# Altium PCB Ethernet Shield v2.0.PcbDoc
Units mil, origin at the board's own origin, x right, y up, seen from the top; angles counter-clockwise.
Board outline 2700 x 2100 mil, 2 copper layers (Top, Bottom); 75 components, 63 nets, 297 pads, 127 vias.
Unrouted connection lines stored in the file: 2.
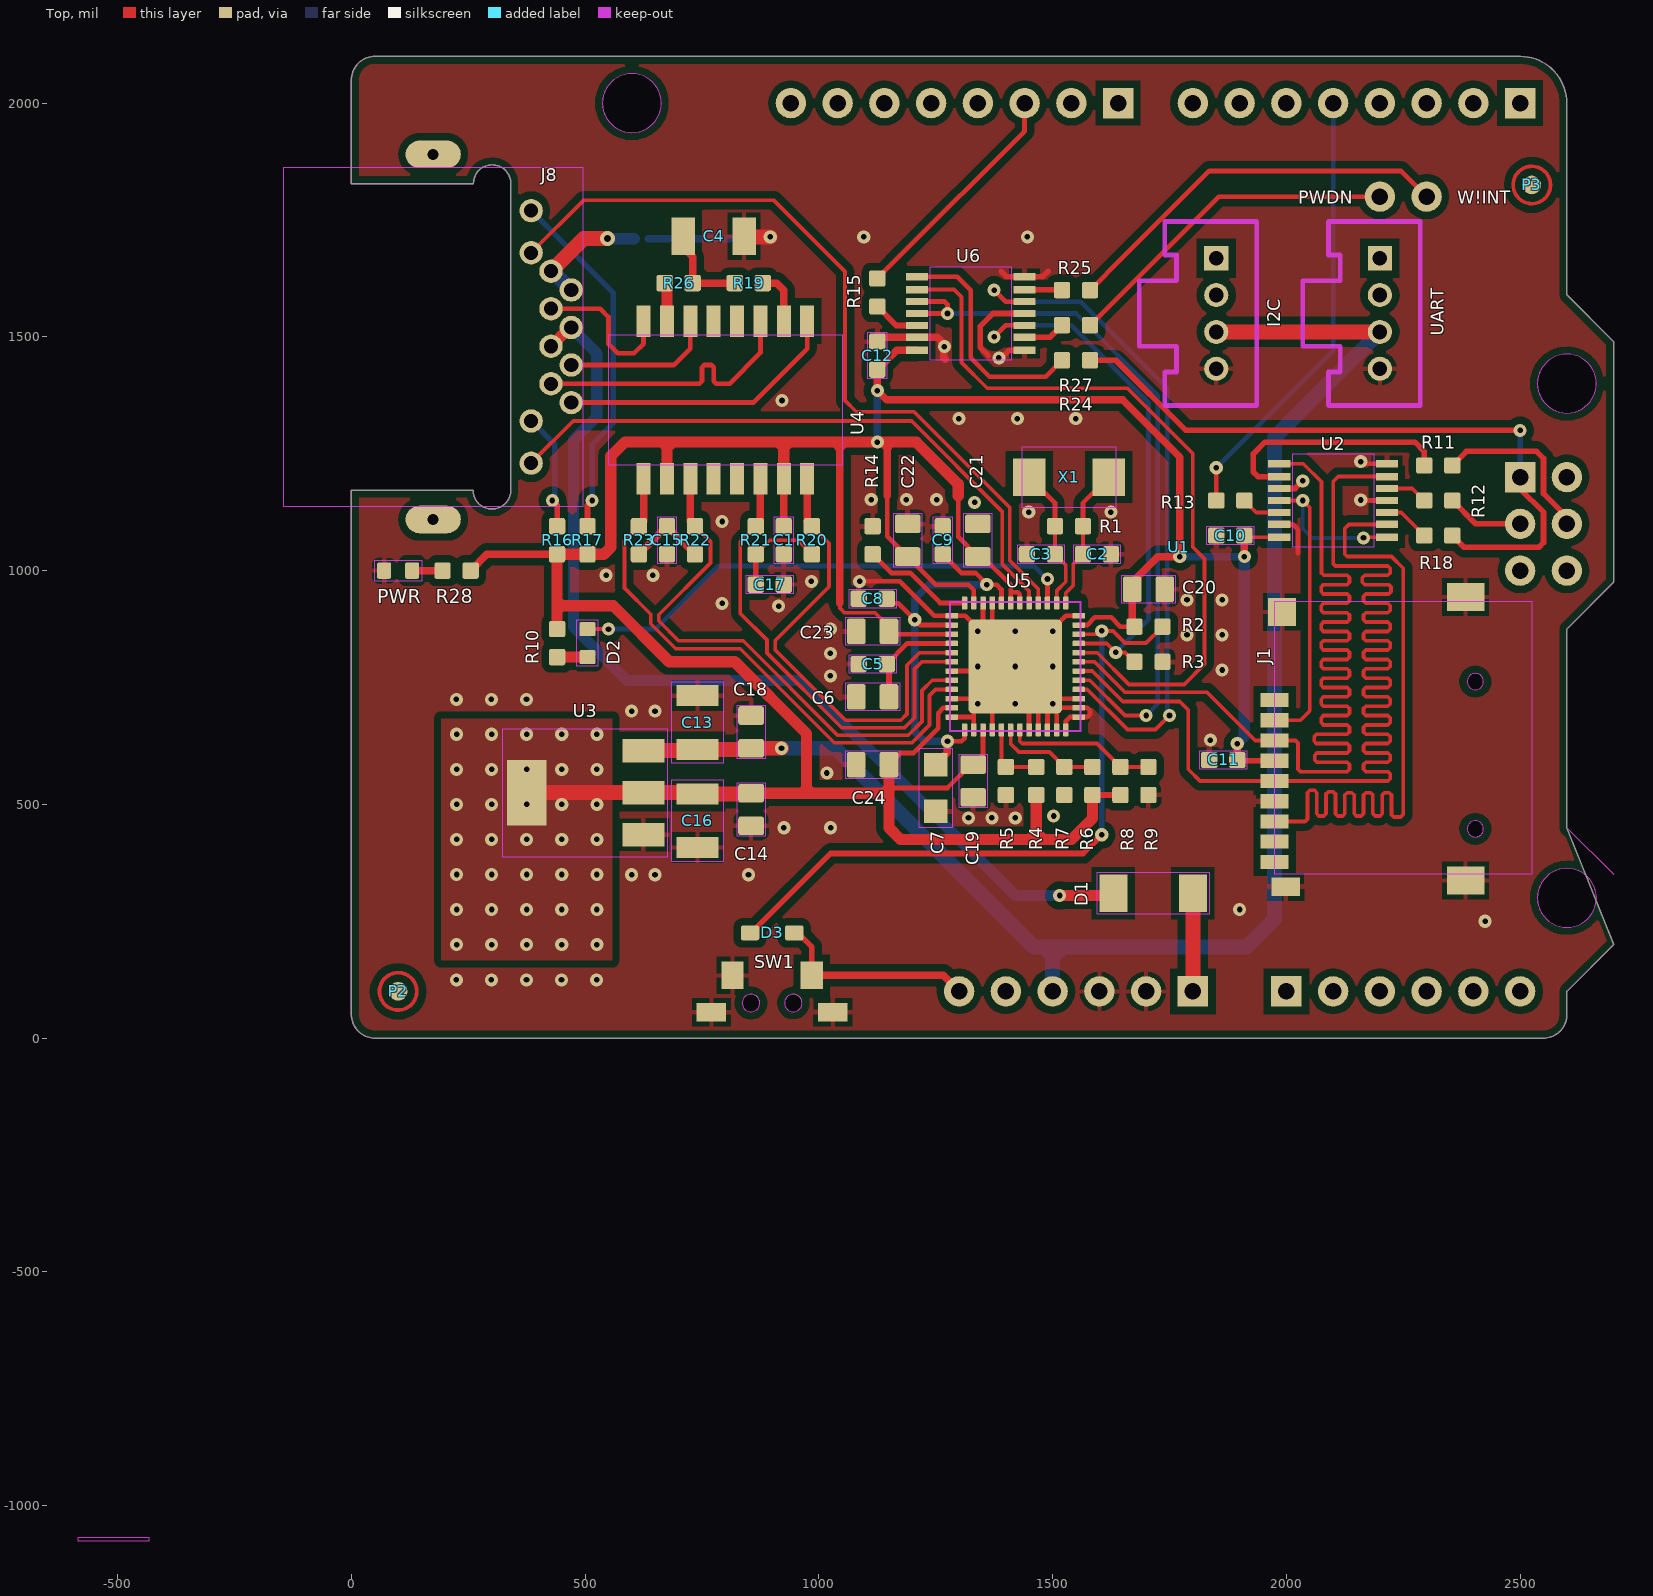
[diagram p0: Top view]
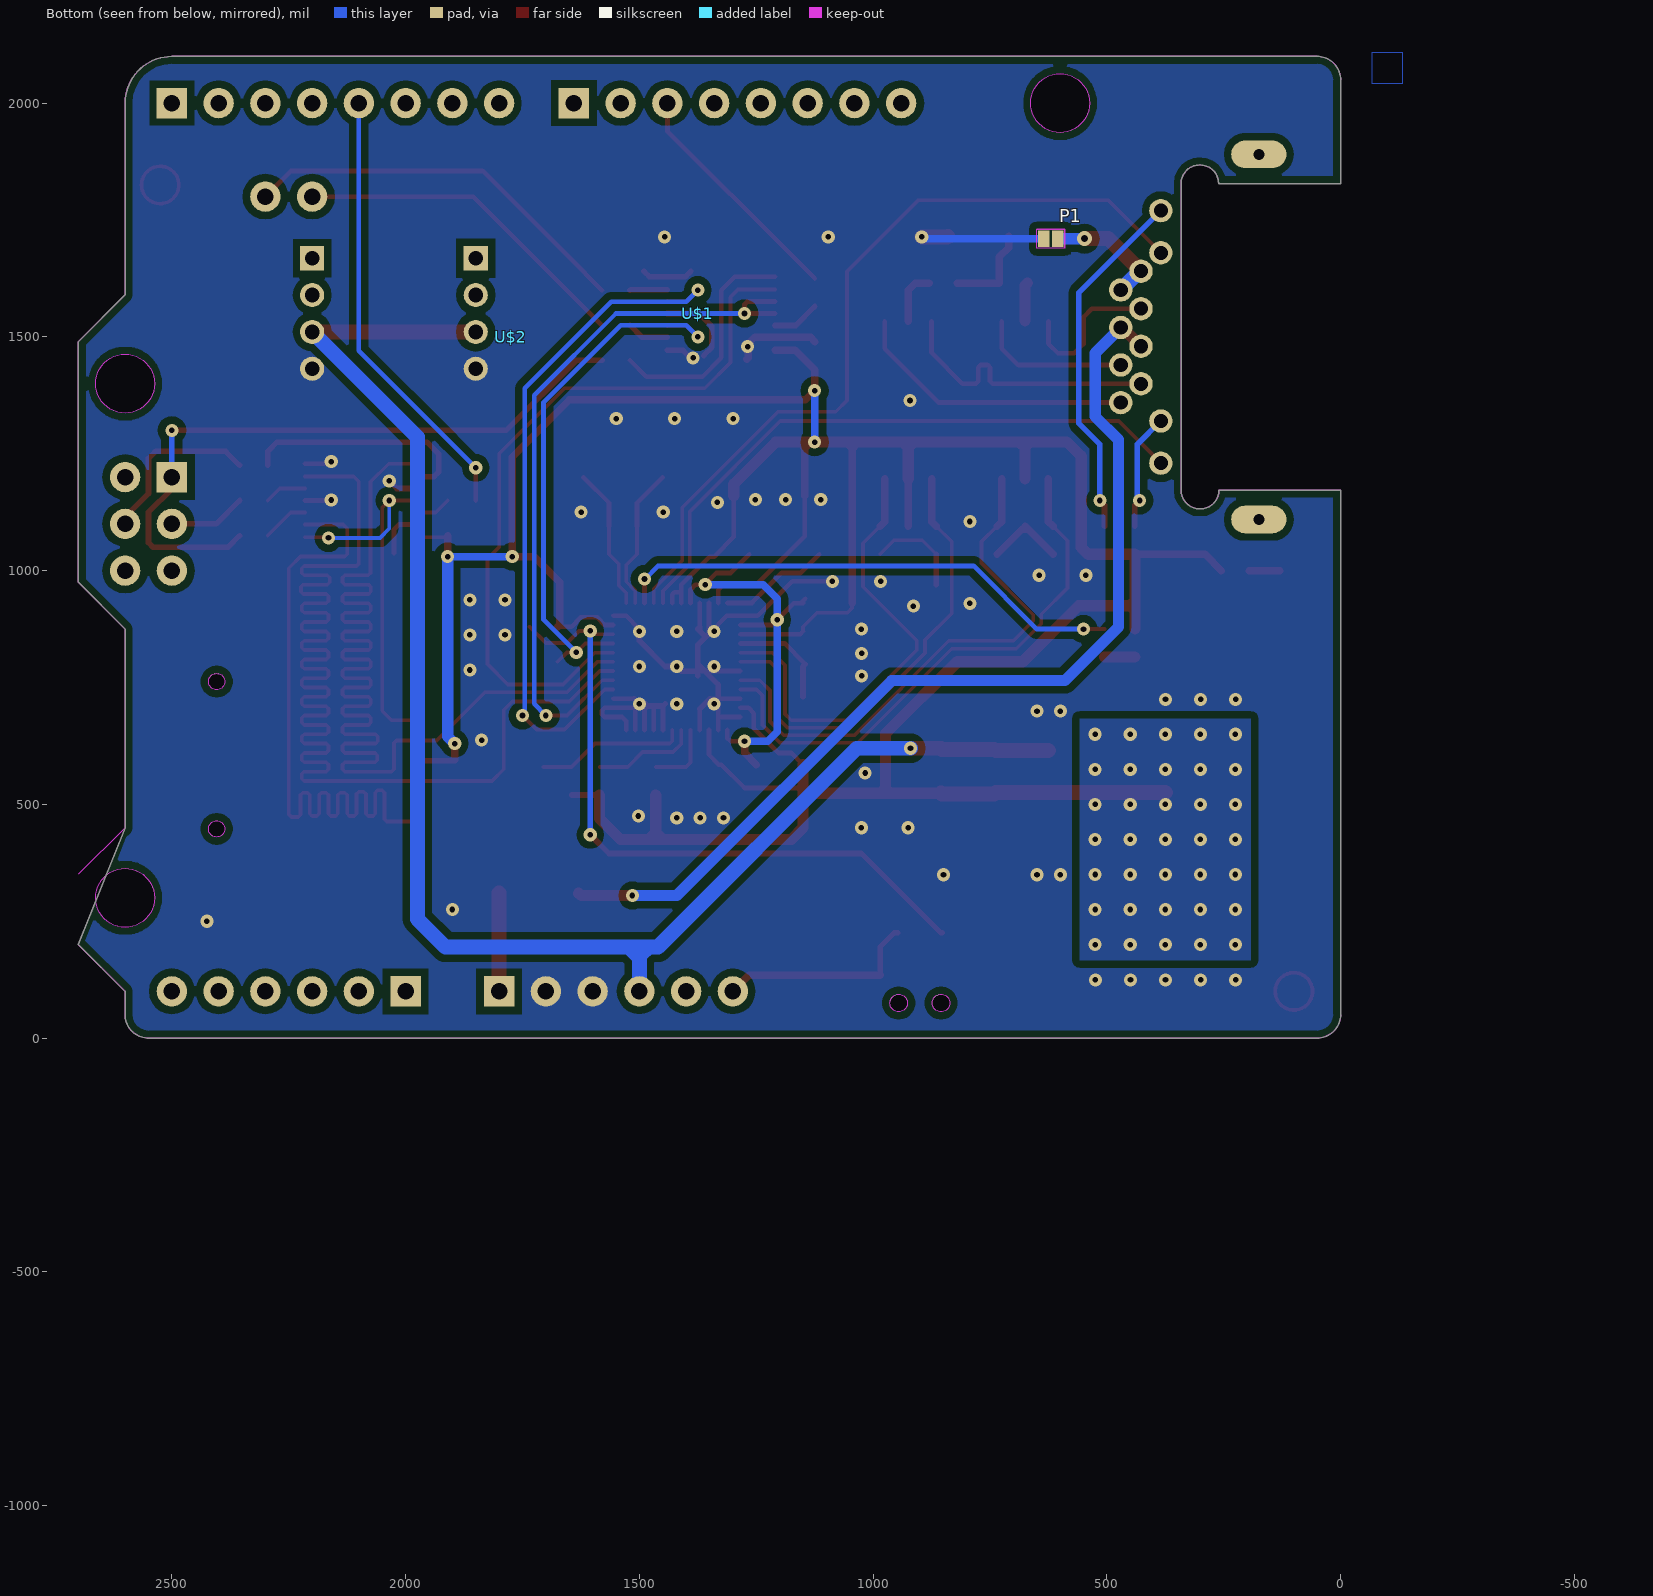
[diagram p1: Bottom view, seen from below]

## Layer stack, top to bottom
Top Solder: solder mask 0.4, Solder Resist, Dk 3.5
Top: signal copper 1.378
Dielectric 1: dielectric 12.6, FR-4, Dk 4.8
Bottom: signal copper 1.378
Bottom Solder: solder mask 0.4, Solder Resist, Dk 3.5

## Board outline
2700,200 2600,100 2600,50 cw(c2550,50) 2550,0 50,0 cw(c50,50) 0,50 0,1172.05 260.24,1172.05 260.24,1171.65 ccw(c299.61,1171.65) 299.61,1132.28 301.57,1132.28 ccw(c301.57,1171.65) 340.94,1171.65 340.94,1828.35 ccw(c301.57,1828.35) 301.57,1867.72 300.4,1867.72 ccw(c300.4,1828.35) 261.03,1828.74 261.02,1827.95 0,1827.95 0,2050 cw(c50,2050) 50,2100 2500,2100 cw(c2500,2000) 2600,2000 2600,1590 2700,1490 2700,975 2600,875 2600,450
cut-out: 2600,237 ccw(c2600,300) 2663,300 ccw(c2600,300) 2600,363 ccw(c2600,300) 2537,300 ccw(c2600,300)
cut-out: 2600,1337 ccw(c2600,1400) 2663,1400 ccw(c2600,1400) 2600,1463 ccw(c2600,1400) 2537,1400 ccw(c2600,1400)
cut-out: 600,1937 ccw(c600,2000) 663,2000 ccw(c600,2000) 600,2063 ccw(c600,2000) 537,2000 ccw(c600,2000)
cut-out: 854.72,56.3 ccw(c854.72,75) 873.42,75 ccw(c854.72,75) 854.72,93.7 ccw(c854.72,75) 836.02,75 ccw(c854.72,75)
cut-out: 945.28,56.3 ccw(c945.28,75) 963.98,75 ccw(c945.28,75) 945.28,93.7 ccw(c945.28,75) 926.58,75 ccw(c945.28,75)
cut-out: 2404.13,430.14 ccw(c2404.13,447.64) 2421.63,447.64 ccw(c2404.13,447.64) 2404.13,465.14 ccw(c2404.13,447.64) 2386.63,447.64 ccw(c2404.13,447.64)
cut-out: 2404.13,745.1 ccw(c2404.13,762.6) 2421.63,762.6 ccw(c2404.13,762.6) 2404.13,780.1 ccw(c2404.13,762.6) 2386.63,762.6 ccw(c2404.13,762.6)

## Design rules (kind name [scope] priority, off if disabled: settings)
BoardOutlineClearance mdCopperDimension [All] p1: gap=10 ignorepadtopadclearanceinfootprint=FALSE except(0: Arc-SplitContinuation Track-SplitContinuation SMDPad-SplitContinuation THPad-SplitContinuation Via-SplitContinuation Fill-SplitContinuation Poly-SplitContinuation Region-SplitContinuation Text-SplitContinuation)
Clearance Clearance_for_PolygonClass_Isolate_16 [InPolygonClass('Isolate_16') vs IsArc Or IsTrack Or IsPad Or IsVia Or IsFill Or IsRegion Or IsText] p1: gap=16 ignorepadtopadclearanceinfootprint=FALSE
Clearance "Clearance (Same Net)" [All] p2: gap=8 ignorepadtopadclearanceinfootprint=FALSE
Clearance Clearance_for_NetClass_usbvcc [InNetClass('usbvcc') vs InNetClass('usbvcc')] p3: gap=8 ignorepadtopadclearanceinfootprint=FALSE
Clearance [All] p4: gap=8 ignorepadtopadclearanceinfootprint=FALSE
HoleSize HoleSize_For_NetClass_usbvcc [InNetClass('usbvcc')] p1: absolutevalues=TRUE maxlimit=12 minlimit=12 maxpercent=80.000 minpercent=20.000
HoleSize HoleSize_For_NetClass_power [InNetClass('power')] p2: absolutevalues=TRUE maxlimit=0 minlimit=0 maxpercent=80.000 minpercent=20.000
HoleSize [All] p3: absolutevalues=TRUE maxlimit=100000 minlimit=12 maxpercent=80.000 minpercent=20.000
HoleToHoleClearance mdDrill [All] p1: gap=8 allowstackedmicrovias=TRUE
MinimumSolderMaskSliver [All] p1 off: minsoldermaskwidth=10
PasteMaskExpansion Expansion_SMDPaste_OFF [InPadClass('SMDPaste_OFF')] p1: expansion=0
PasteMaskExpansion mlMinCreamFrame [All] p2: expansion=0
PolygonConnect PolygonConnect_For_PolygonThermal_ON_Width100000_Gap100000 [InPolygonClass('PolygonThermal_ON_Width100000_Gap100000') vs Not IsVia] p1: connectstyle=Relief reliefconductorwidth=10 reliefentries=4 polygonreliefangle="90 Angle" airgapwidth=10
PolygonConnect PolygonConnect_For_PolygonThermal_OFF [InPolygonClass('PolygonThermal_OFF')] p2: connectstyle=Direct reliefconductorwidth=10 reliefentries=4 polygonreliefangle="90 Angle" airgapwidth=10
PolygonConnect PolygonConnect_For_PolygonThermal_ON_Width160000_Gap100000 [InPolygonClass('PolygonThermal_ON_Width160000_Gap100000') vs Not IsVia] p3: connectstyle=Relief reliefconductorwidth=16 reliefentries=4 polygonreliefangle="90 Angle" airgapwidth=10
PolygonConnect ThermalVias [IsVia] p4: connectstyle=Direct reliefconductorwidth=10 reliefentries=4 polygonreliefangle="90 Angle" airgapwidth=10
PolygonConnect [All] p5: connectstyle=Relief reliefconductorwidth=10 reliefentries=4 polygonreliefangle="90 Angle" airgapwidth=10
RoutingVias [All] p1: holewidth=12 width=28 viastyle="Through Hole" minholewidth=12 minwidth=28 maxholewidth=100 maxwidth=100
SolderMaskExpansion Expansion_SMDSolder_OFF [InPadClass('SMDSolder_OFF')] p1: expansion=0 istentingtop=FALSE
SolderMaskExpansion mlMinStopFrame [All] p2: expansion=4 istentingtop=FALSE
Width Width_For_NetClass_usbvcc [InNetClass('usbvcc')] p1: maxlimit=10 minlimit=8 preferedwidth=8
Width Width_For_NetClass_power [InNetClass('power')] p2: maxlimit=10 minlimit=99999 preferedwidth=5 toplayer_minwidth=0 bottomlayer_minwidth=0 minimp=50.000000 maximp=50.000000 favimp=50.000000
Width [All] p3: maxlimit=10 minlimit=8 preferedwidth=8
26 further rules are at their usual default settings.

## Classes and differential pairs
polygon class PolygonThermal_ON_Width100000_Gap100000: Polygon_2_Net_GND Polygon_3_Net_GND
polygon class PolygonThermal_OFF: Polygon_1_Net_3V3 Polygon_2_Net_3V3 Polygon_3_Net_3V3
polygon class PolygonThermal_ON_Width160000_Gap100000: Polygon_1_Net_GND
polygon class Isolate_16: Polygon_1_Net_3V3 Polygon_2_Net_3V3 Polygon_2_Net_GND Polygon_3_Net_3V3 Polygon_3_Net_GND
pad class SMDSolder_OFF: P2-P$1 P3-P$1
pad class SMDPaste_OFF: P2-P$1 P3-P$1
net class usbvcc: 5V
net class power: EGND

## Components (designator, comment, footprint, x,y, rotation, side; value= is the part's Value field where it differs from the comment)
C1 "100nF" C0603 925,1065 r270 top
C2 "8.2pF" C0603 1595,1035 r180 top
C3 "8.2pF" C0603 1475,1035 r0 top
C4 "1000v_1nF" C1206 775,1715 r180 top
C5 "100nF" C0603 1115,800 r0 top
C6 "10uF" C0805 1115,730 r0 top
C7 "10V_10uF" AVX-A 1250,535 r270 top
C8 "100nF" C0603 1115,940 r180 top
C9 "100nF" C0603 1265,1065 r90 top
C10 "100nF" C0603 1880,1075 r0 top
C11 "100nF" C0603 1865,595 r0 top
C12 "100nF" C0603 1125,1460 r270 top
C13 "10V_22uF" AVX-B 740,675 r90 top
C14 "10uF" C0805 855,489 r270 top
C15 "100nF" C0603 675,1065 r270 top
C16 "10V_22uF" AVX-B 740,465 r270 top
C17 "100nF" C0603 895,970 r0 top
C18 "10uF" C0805 855,655 r270 top
C19 "1uF" C0805 1330,550 r90 top
C20 "1uF" C0805 1705,960 r180 top
C21 "1uF" C0805 1340,1065 r270 top
C22 "1uF" C0805 1190,1065 r270 top
C23 "1uF" C0805 1115,870 r0 top
C24 "1uF" C0805 1115,585 r0 top
D1 "M7" D2010 1715,310 r0 top
D2 "RED" LED-0603 505,845 r90 top
D3 "1N4148WS" SOD323 900,225 r0 top
I2C "TWIG-4P-2.0" 4P-2.0 1850,1550 r270 top
J1 "SD card holder" 9P-SMD-W/-RING 1975,550 r0 top
J8 "RJ45-MJ88-BX11-RVSL2" RJ45-MJ88-BX11-RVSL2 175,1500 r270 top
P1 "" 2P-SMD-1.78X1.27 620,1710 r270 bottom
P2 "" ROUND-MARK-1.0 100,100 r0 top
P3 "" ROUND-MARK-1.0 2525,1825 r0 top
PWDN "DNP" 1P-65/35MIL 2200,1800 r0 top
PWR "GREEN" LED-0603 100,1000 r180 top
R1 "1M" R0603 1535,1095 r180 top
R2 "10K" R0603 1705,880 r180 top
R3 "47k" R0603 1705,805 r0 top
R4 "10K" R0603 1465,550 r90 top
R5 "10K" R0603 1400,550 r270 top
R6 "10K" R0603 1585,550 r90 top
R7 "10K" R0603 1525,550 r270 top
R8 "10K" R0603 1645,550 r90 top
R9 "10K" R0603 1705,550 r270 top
R10 "1k" R0603 440,845 r90 top
R11 "3.3k" R0603 2325,1225 r180 top
R12 "3.3k" R0603 2325,1150 r180 top
R13 "3.3k" R0603 1880,1150 r0 top
R14 "28.7K/1%" R0603 1115,1065 r270 top
R15 "3.3k" R0603 1125,1595 r270 top
R16 "1k" R0603 440,1065 r270 top
R17 "1k" R0603 505,1065 r270 top
R18 "1k" R0603 2325,1075 r180 top
R19 "75" R0603 850,1615 r0 top
R20 "49.9_1%" R0603 985,1065 r90 top
R21 "49.9_1%" R0603 865,1065 r270 top
R22 "49.9_1%" R0603 735,1065 r90 top
R23 "49.9_1%" R0603 615,1065 r270 top
R24 "1k" R0603 1550,1450 r180 top
R25 "1k" R0603 1550,1600 r0 top
R26 "75" R0603 700,1615 r180 top
R27 "3.3k" R0603 1550,1525 r180 top
R28 "" R0603 225,1000 r180 top
SW1 "BUTTON_4P_SMD" 4P-SMD-7X3.5X3.5 900,75 r0 top
U1 "" ARDUINO 0,0 r0 top
U2 "74VHC125PW" TSSOP14 2100,1150 r90 top
U3 "CJ1117-3.3" SOT-223 500,525 r90 top
U4 "HX1198NL" SOIC16-9.53 800,1365 r180 top
U5 "W5200" QFN48 1420,795 r180 top
U6 "74VHC125PW" TSSOP14 1325,1550 r90 top
U$1 "" LOGO_SILK 1375,1550 r180 bottom
U$2 "" OSHW_FILLX200_NOTEXT 1775,1500 r180 bottom
UART "TWIG-4P-2.0" 4P-2.0 2200,1550 r270 top
W!INT "DNP" 1P-65/35MIL 2300,1800 r0 top
X1 "25MHz" 2P-SMD-5X3.2 1535,1200 r180 top

## Footprints (in the part's own frame and the unit in brackets; to place one, negate y for a bottom-side part, rotate by r counter-clockwise, add the part's x,y. Pads: shape width x height; smd on the part's side, far side on the other; paste and mask are expansions set on the pad)
1P-65/35MIL [mil] "1P-65/35MIL"
  round 65 hole 35: P$1(0,0)
2P-SMD-1.78X1.27 [mil] "2P-SMD-1.78X1.27"
  rect 35x24 smd: 1(0,15) 2(0,-15)
  Top keep-out region: -20,-30 -20,30 20,30 20,-30
  Top keep-out lines w0: 20,30 20,-30 -20,-30 -20,30 20,30
2P-SMD-5X3.2 [mil] "2P-SMD-5X3.2"
  rect 70x80 smd: 1(-85,0) 2(85,0)
  Top keep-out region: -100,-65 -100,65 100,65 100,-65
4P-2.0 [mil] "4P-2.0"
  rect 51.5x51.5 / inner round 47.58 / far side rect 51.5x51.5 hole 31.5: 1(-118.11,0)
  round 51.5 hole 31.5: 2(-39.37,0) 3(39.37,0) 4(118.11,0)
  Top keep-out lines w10: 196.85,-110.24 196.85,86.61 -196.85,86.61 -196.85,-110.24 ; 195,-110 125,-110 125,-85 70,-85 70,-165 -70,-165 -70,-85 -125,-85 -125,-110 -195,-110
4P-SMD-7X3.5X3.5 [mm] "4P-SMD-7X3.5X3.5"
  rect 1.2x1.5 smd: 1(-2.15,1.5) 2(2.15,1.5)
  rect 1.6x1 smd: S1(-3.3,-0.5) S2(3.3,-0.5)
9P-SMD-W/-RING [mil] "9P-SMD-W/-RING"
  rect 60x30 smd: 1(0,173.23) 2(0,129.92) 3(0,86.61) 4(0,43.31) 5(0,0) 6(0,-43.31) 7(0,-86.61) 8(0,-129.92) 9(0,-173.23)
  rect 60x40 smd: G1(23.62,-226.22)
  rect 80x60 smd: G2(408.39,-212.6) G3(408.39,393.7)
  rect 60x60 smd: G4(15.43,361.46)
  Top keep-out region: 0,-200 0,385 550,385 550,-200
ARDUINO [mil] "ARDUINO"
  rect 65x65 / inner round 60.05 / far side rect 65x65 hole 35: 1(2500,2000) 9(1640,2000) 17(2000,100) 23(1800,100) 36(2500,1200)
  round 65 hole 35: 2(2400,2000) 3(2300,2000) 4(2200,2000) 5(2100,2000) 6(2000,2000) 7(1900,2000) 8(1800,2000) 10(1540,2000) 11(1440,2000) 12(1340,2000) 13(1240,2000) 14(1140,2000) 15(1040,2000) 16(940,2000) 18(2100,100) 19(2200,100) 20(2300,100) 21(2400,100) 22(2500,100) 24(1700,100) 25(1600,100) 26(1500,100) 27(1400,100) 28(1300,100) 31(2600,1200) 32(2600,1100) 33(2600,1000) 34(2500,1000) 35(2500,1100)
AVX-A [mil] "AVX-A"
  rect 50x50 smd: +(-50,0) -(50,0)
  Top keep-out region: -85,-35 -85,35 85,35 85,-35
AVX-B [mil] "AVX-B"
  rect 45x90 smd: +(-57.5,0) -(57.5,0)
  Top keep-out region: -87.5,-55 -87.5,55 87.5,55 87.5,-55
C0603 [mil] "C0603"
  rrect25% 35x35 smd: 1(-30,0) 2(30,0)
  Top keep-out region: -50,-20 -50,20 50,20 50,-20
C0805 [mil] "C0805"
  rrect25% 40x55 smd: 1(-35,0) 2(35,0)
  Top keep-out region: -57.5,-30 -57.5,30 57.5,30 57.5,-30
C1206 [mil] "C1206"
  rect 50x80 smd: 1(-65,0) 2(65,0)
D2010 [mil] "D2010"
  rect 60x80 smd: +(-85,0) -(85,0)
  Top keep-out region: -120,-45 -120,45 120,45 120,-45
LED-0603 [mil] "LED-0603"
  rrect25% 30x35 smd: +(-30,0) -(30,0)
  Top keep-out region: -50,-22.5 -50,22.5 50,22.5 50,-22.5
LOGO_SILK [mil] "LOGO_SILK"
OSHW_FILLX200_NOTEXT [mil] "OSHW_FILLX200_NOTEXT"
QFN48 [mil] "QFN48"
  rrect30% 11.81x27.56 smd: 1(-108.27,-135.83) 2(-88.58,-135.83) 3(-68.9,-135.83) 4(-49.21,-135.83) 5(-29.53,-135.83) 6(-9.84,-135.83) 7(9.84,-135.83) 8(29.53,-135.83) 9(49.21,-135.83) 10(68.9,-135.83) 11(88.58,-135.83) 12(108.27,-135.83) 25(108.27,135.83) 26(88.58,135.83) 27(68.9,135.83) 28(49.21,135.83) 29(29.53,135.83) 30(9.84,135.83) 31(-9.84,135.83) 32(-29.53,135.83) 33(-49.21,135.83) 34(-68.9,135.83) 35(-88.58,135.83) 36(-108.27,135.83)
  rrect30% 27.56x11.81 smd: 13(135.83,-108.27) 14(135.83,-88.58) 15(135.83,-68.9) 16(135.83,-49.21) 17(135.83,-29.53) 18(135.83,-9.84) 19(135.83,9.84) 20(135.83,29.53) 21(135.83,49.21) 22(135.83,68.9) 23(135.83,88.58) 24(135.83,108.27) 37(-135.83,108.27) 38(-135.83,88.58) 39(-135.83,68.9) 40(-135.83,49.21) 41(-135.83,29.53) 42(-135.83,9.84) 43(-135.83,-9.84) 44(-135.83,-29.53) 45(-135.83,-49.21) 46(-135.83,-68.9) 47(-135.83,-88.58) 48(-135.83,-108.27)
  rrect10% 200.79x200.79 smd: PAD(0,0)
  Top keep-out region: -137.8,-137.8 -137.8,137.8 137.8,137.8 137.8,-137.8
R0603 [mil] "R0603"
  rrect25% 35x35 smd: 1(-30,0) 2(30,0)
RJ45-MJ88-BX11-RVSL2 [mil] "RJ45-MJ88-BX11-RVSL2"
  round 50 hole 30: 1(140.55,295.28) 2(100.39,251.97) 3(60.24,295.28) 4(20.08,251.97) 5(-20.08,295.28) 6(-60.24,251.97) 7(-100.39,295.28) 8(-140.55,251.97) 9(270.08,209.45) 10(179.92,209.45) 11(-179.92,209.45) 12(-270.08,209.45)
  oval 59.06x118.12 hole 23.62: 13(-390.55,0) 14(390.55,0)
  Top keep-out region: -363.19,-320 -363.19,320 363.19,320 363.19,-320
ROUND-MARK-1.0 [mil] "ROUND-MARK-1.0"
  rrect100% 40x40 smd paste+0 mask+0: P$1(0,0)
  Top circle w8: c0,0 r40
SOD323 [mil] "SOD323"
  rrect25% 39.37x31.5 smd: +(-47.24,0) -(47.24,0)
SOIC16-9.53 [mil] "SOIC16-9.53"
  rect 30x67.5 smd: 1(-175,-168.75) 2(-125,-168.75) 3(-75,-168.75) 4(-25,-168.75) 5(25,-168.75) 6(75,-168.75) 7(125,-168.75) 8(175,-168.75) 9(175,168.75) 10(125,168.75) 11(75,168.75) 12(25,168.75) 13(-25,168.75) 14(-75,168.75) 15(-125,168.75) 16(-175,168.75)
  Top keep-out region: -250,-140 -250,140 250,140 250,-140
SOT-223 [mil] "SOT-223"
  rect 50x90 smd: 1(-90,-125) 2(0,-125) 3(90,-125)
  rect 140x85 smd: TER(0,125)
  Top keep-out lines w2: -136.73,176.5 -136.73,-176.5 136.73,-176.5 136.73,176.5 -136.73,176.5
TSSOP14 [mm] "TSSOP14"
  rect 0.4x1.2 smd: 1(-2,-2.925) 2(-1.3,-2.925) 3(-0.65,-2.925) 4(0,-2.925) 5(0.65,-2.925) 6(1.3,-2.925) 7(2,-2.925) 8(2,2.925) 9(1.3,2.925) 10(0.65,2.925) 11(0,2.925) 12(-0.65,2.925) 13(-1.3,2.925) 14(-2,2.925)
  Top keep-out region: -2.54,-2.2 -2.54,2.2 2.54,2.2 2.54,-2.2

## Part data
C1 C2 C3 C5 C8 C9 C10 C11 C12 C15 C17: library part C0603, PackageName=C0603
C4: library part C1206, PackageName=C1206
C6 C14 C18 C19 C20 C21 C22 C23 C24: library part C0805, PackageName=C0805
C7: library part AVX-A, PackageName=AVX-A
C13 C16: library part AVX-B, PackageName=AVX-B
D1: library part D2010, PackageName=D2010
D2 PWR: library part LED-0603, PackageName=LED-0603
D3: library part SOD323, PackageName=SOD323
I2C UART: library part 4P-2.0, PackageName=4P-2.0
J1: library part 9P-SMD-W/-RING, PackageName=9P-SMD-W/-RING
P1: library part 2P-SMD-1.78X1.27, PackageName=2P-SMD-1.78X1.27
P2 P3: library part ROUND-MARK-1.0, PackageName=ROUND-MARK-1.0
PWDN W!INT: library part 1P-65/35MIL, PackageName=1P-65/35MIL
R1 R2 R3 R4 R5 R6 R7 R8 R9 R10 R11 R12 R13 R14 R15 R16 R17 R18 R19 R20 R21 R22 R23 R24 R25 R26 R27 R28: library part R0603, PackageName=R0603
SW1: library part 4P-SMD-7X3.5X3.5, PackageName=4P-SMD-7X3.5X3.5
U1: library part ARDUINO, PackageName=ARDUINO
U2 U6: library part TSSOP14, PackageName=TSSOP14
U3: library part SOT-223, PackageName=SOT-223
U4: library part SOIC16-9.53, PackageName=SOIC16-9.53
U5: library part QFN48, PackageName=QFN48
U$1: library part LOGO_SILK, PackageName=LOGO_SILK
U$2: library part OSHW_FILLX200_NOTEXT, PackageName=OSHW_FILLX200_NOTEXT
X1: library part 2P-SMD-5X3.2, PackageName=2P-SMD-5X3.2
J8: PackageName=RJ45-MJ88-BX11-RVSL2

## Free pads (board coordinates)
  round 126 hole 126 unplated: MH1(600,2000) MH2(2600,1400) MH3(2600,300)
  round 37.4 hole 37.4 unplated: MH1(854.72,75) MH2(945.28,75)
  round 35 hole 35 unplated: MH1(2404.13,447.64) MH2(2404.13,762.6)

## Via types
v1: diameter 28/28 (per signal layer), hole 12, Top to Bottom, 126 vias
v2: diameter 32/32 (per signal layer), hole 15, Top to Bottom, 1 vias

## Nets (pads, with @x,y where several pads share a name; then routed paths per layer and width w, separated by ;. In a path a pad name is that pad's centre, name@x,y a point inside that pad or via, vN(x,y) a via of type N, cw(c..) or ccw(c..) an arc to the next point about the centre after c; other vN are vias at no path point)
1V8: C7.+ C8.1 C9.1 U5.8 U5.14 U5.25 | length 998.5
  Top w10: C8.1 1150,935 1150,930 1170,930 v1(1205,895) 1216.42,883.58 U5.14 ; C9.1 1305,995 1335,995 1359,971 v1(1359,970) 1380,970 1390.47,959.53 U5.8 ; v1(1275,635) 1305,635 1311.73,641.73 U5.25
  Top w16: C7.+ 1275,610 v1(1275,635)
  Bottom w16: v1(1275,635) 1225,635 1205,655 v1(1205,895) 1205,940 1235,970 v1(1359,970)
3V3: C1.1 C10.2 C11.2 C12.2 C14.1 C16.+ C19.2 C20.2 C21.2 C22.2 C23.2 C24.2 J1.4 R2.2 R4.1 R6.1 R8.1 R10.2 R16.2 R17.2 R28.1 U2.14 U3.2 U3.TER U4.10 U4.15 U5.6 U5.7 U5.11 U5.15 U5.23 U5.27 U5.47 U6.14 | length 8586.2
  Top w8: 1045,930 1045,920 1055,910 1120,910 1150,880 C23.2 ; C24.2 C24.2@1150,590 ; C10.2 1913.74,1071.26 U2.14
  Top w10: 916,1272 917,1272 920,1275 ; 1146,1160 1146,1074 C22.2 1250,970 1320,970 1331.42,958.58 U5.11 ; 1150,540 1155,535 1275,535 1325,585 C19.2 1351.1,606.1 U5.27 ; 1150,550 1155,545 1155,542.5 1162.5,535 1155,527.5 ; C24.2 1175,610 1202.5,610 1255,662.5 1255,695 1266.42,706.42 U5.23 ; C23.2 1156.1,863.9 U5.15 ; 1298,1164 1298,1160 1298,1072 C21.2 1350,1030 1410.16,969.84 1410.16,954 ; U5.7 1410.16,954 ; U5.6 1429.84,949.16 1425,954 1410.16,954 ; U5.47 1573.58,883.58 1590,900 1625,900 1645,880 R2.2
  Top w12: R6.1 R8.1 ; C11.2 1896.69,593.31 J1.4
  Top w16: R28.1 290,1035 R16.2 ; C1.1 U4.15 ; 1035,1270 1045,1260 ; 1045,930 1045,1260 ; 1050,1275 1045,1270 1045,1261 ; 1056,1272 1045,1261 ; v1@1138,1270 1146,1262 ; 1146,1160 1146,1262 ; 1155,1275 1146,1266 1146,1262 ; 1156,1272 1146,1262 ; U6.14 1166.26,1471.26 C12.2 v1(1125,1385) 1145,1365 1650,1365 1772,1243 v1(1772,1030) 1725,1030 1670,975 C20.2 1670,885 R2.2 ; C11.2 v1(1895,630) ; v1(1910,1030) C10.2 ; 1045,1260 1045,1261
  Top w24: R10.2 440,910 440,915 ; U4.10 675,1263 ; 682,1270 675,1263 ; C14.1 980,524 ; 916,1272 925,1263 934,1272 ; U4.15 925,1275 ; 965,525 973.47,533.47 ; 982,526 973.47,534.53 ; C24.2 1150,550 1150,540 1150,535 ; 1298,1160 1298,1185.17 1208.17,1275 1155,1275 v1(1125,1275) 1050,1275 925,1275 ; R4.1 1465,425 ; R6.1 1585,470 1540,425 1480,425 ; 440,915 450,925 ; 440,915 440,935 ; 440,935 450,925 ; 440,935 R16.2 R17.2 540,1035 555,1050 555,1245 585,1275 665,1275 ; 450,925 560,925 680,805 820,805 973.47,651.53 973.47,534.53 ; 665,1275 675,1265 675,1263 ; 665,1275 920,1275 925,1275 ; 973.47,533.47 973.47,534.53 ; 973.47,533.47 973.47,530.53 980,524 ; 980,524 1136,524 ; 1136,524 1150,510 ; 1136,524 1139,524 ; 1139,524 1150,535 ; 1139,524 1146,524 1150,520 ; 1150,510 1150,450 1175,425 1450,425 ; 1150,510 1150,520 ; 1150,520 1150,535 ; 1450,425 1465,440 1480,425 ; 1450,425 1465,425 ; 1465,425 1480,425
  Top w32: U3.TER U3.2 737.5,525 C16.+ 853.5,522.5 C14.1
  Bottom w16: v1(1125,1275) v1(1125,1385) ; v1(1772,1030) v1(1910,1030)
  Bottom w24: v1(1895,630) 1910,645 v1(1910,1030)
  other v1: 225,200 300,200 375,200 450,200 525,200 225,275 300,275 375,275 450,275 525,275 225,350 300,350 375,350 450,350 525,350 225,425 300,425 375,425 450,425 525,425 225,500 300,500 375,500 450,500 525,500 225,575 300,575 375,575 450,575 525,575 225,650 300,650 375,650 450,650 525,650
5V: C13.+ C18.2 I2C.3 U1.26 U3.3 UART.3 | length 3396.3
  Top w32: U3.3 737.5,615 C13.+ 852.5,617.5 C18.2 v1(920,620) ; I2C.3 UART.3
  Bottom w32: v1(920,620) 1035,620 1460,195 1500,195 ; 1485,190 1500,175 ; U1.26 1500,172.5 ; 1520,192.5 1500,172.5 ; UART.3 1975,1285.63 1975,255 1915,195 1500,195 ; 1500,172.5 1500,175 ; 1500,175 1500,195
EGND: J8.7 J8.8 P1.1 | length 266.7
  Top w32: J8.8 496.42,1710 v2(548,1710)
  Bottom w24: v2(548,1710) P1.1
  Bottom w32: J8.8 430.12,1640.55 J8.7
EP+: D1.+ J8.4 J8.5 | length 2138.9
  Top w24: J8.4 467.13,1520.08 J8.5 ; v1(1515,305) 1625,305 D1.+
  Bottom w24: J8.5 470.28,1519.72 525,1465 525,1330 475,1280 475,879.55 589.55,765 960,765 1420,305 v1(1515,305)
FDXLED: D2.- U5.3 | length 1102.7
  Top w8: D2.- v1(550,875)
  Top w10: U5.3 1488.9,981.9 v1(1489,982)
  Bottom w10: v1(550,875) 650,875 785,1010 1460,1010 1488,982 v1(1489,982)
GND: C1.2 C2.1 C3.1 C4.1 C5.1 C6.1 C7.- C8.2 C9.2 C10.1 C11.1 C12.1 C13.- C14.2 C15.2 C16.- C17.2 C18.1 C19.1 C20.1 C21.1 C22.1 C23.1 C24.1 I2C.4 J1.6 J1.G1 J1.G2 J1.G3 J1.G4 P1.2 PWR.- R3.2 R5.2 R7.2 R9.2 R14.1 SW1.1 SW1.S1 SW1.S2 U1.24 U1.25 U2.4 U2.7 U2.10 U2.13 U3.1 U5.9 U5.10 U5.13 U5.19 U5.22 U5.24 U5.26 U5.28 U5.32 U5.33 U5.34 U5.35 U5.36 U5.37 U5.38 U5.39 U5.48 U5.PAD U6.1 U6.4 U6.7 U6.13 UART.4 | length 2949.2
  Top w10: v1(1087,977) 1173,977 1246.73,903.27 U5.13 1312.73,903.27 U5.PAD@1351,865 ; U5.24 1330.15,686.73 1331.42,688 ; U5.22 U5.PAD@1348.9,726.1 ; U5.19 U5.PAD@1375,785.16 ; U5.26 1331.42,688 ; U5.PAD@1331.42,725 1331.42,688 ; U5.PAD@1351.1,865.1 U5.10 ; U5.28 U5.PAD@1370.79,704.21 ; U5.PAD@1370.79,879.21 U5.9 ; U5.32 U5.PAD@1449.53,710.47 ; U5.33 U5.PAD@1469.21,709.21 ; U5.34 U5.PAD@1488.9,703.9 ; U5.PAD@1497.58,706.42 U5.38 1573.58,706.42 1580,700 1580,692.71 1574.03,686.73 U5.37 1536.73,686.73 1528.27,678.27 U5.36 ; U5.PAD@1500,875 1528.27,903.27 U5.48 ; U5.35 U5.PAD@1508.58,706.42 ; U5.PAD@1511.1,726.1 U5.39 ; U2.13 2013.68,1098.82 2025,1087.5 2025,1037.5 ; v1(2159,1151) 2160,1150 U2.4 ; v1(2159,1233) 2163.26,1228.74 U2.7
  Top w12: U5.PAD@1348.9,726.1 U5.PAD@1350,725 ; U5.PAD@1351.1,865.1 1351,865 U5.PAD@1358,858 ; 1362.5,1460 1345,1477.5 1345,1522.5 1372.5,1550 U6.4 ; U5.PAD@1370.79,704.21 U5.PAD@1350,725 ; U5.PAD@1375,775 U5.PAD@1375,785.16 ; U5.PAD@1375,875 1370.79,879.21 1370.79,870.79 U5.PAD@1358,858 ; v1(1385,1455) v1@1392,1460 ; v1@1390,1455 1406.26,1471.26 U6.1 ; 1390,1640 1401.26,1628.74 U6.7 1478.74,1628.74 1490,1640 ; U5.PAD@1445,715 1449.53,710.47 1495.47,710.47 v1(1500,715) ; U5.PAD@1469.21,709.21 1470,710 1495,710 v1(1500,715) ; U5.PAD@1488,716 1497.58,706.42 1497.58,712.58 v1(1500,715) ; U5.PAD@1488.9,703.9 v1(1500,715) ; U5.PAD@1500,875 1500,850 1445,795 v1(1420,795) 1410.16,785.16 U5.PAD@1375,785.16 ; U5.PAD@1508.58,706.42 v1(1500,715) ; U5.PAD@1511.1,726.1 v1(1500,715) ; U2.10 2018.59,1175.59 v1(2035,1192) ; U5.PAD@1350,725 1331.42,725 1331.42,756.42 U5.PAD@1375,800 ; U5.PAD@1358,858 1375,841 U5.PAD@1375,800 ; U5.PAD@1375,785.16 U5.PAD@1375,800
  Top w16: C12.1 1133.82,1498.82 U6.13 1253.68,1498.82 1267.5,1485 1267.5,1455 1270,1452.5
  Top w32: C4.1 841,1714 v1(896,1714)
  Bottom w16: P1.2 892,1710 v1(896,1714)
  other v1: 224.5,124.5 299.5,124.5 374.5,124.5 449.5,124.5 524.5,124.5 2425,250 1900,275 599.5,349.5 649.5,349.5 849.5,349.5 925,450 1025,450 1320,471 1370,471 1420,471 1502,475 1017,567 1837.5,637.5 599.5,699.5 649.5,699.5 1340,715 1420,715 224.5,724.5 299.5,724.5 374.5,724.5 1024.5,775 1862.5,787.5 1340,795 1500,795 1024.5,823 1787.5,862.5 1862.5,862.5 1340,870 1420,870 1500,870 1025,875 914,924 793,930 1787.5,937.5 1862.5,937.5 984,977 545,990 645,990 793,1105 1449,1125 1624.5,1125 1333,1146 1112,1152 1187,1152 1252,1152 1299.5,1325 1424.5,1325 1549.5,1325 921,1364 1268.5,1479 1096,1714 1446,1714
LINKLED: J8.9 U5.5 | length 1344.6
  Top w8: J8.9 474.53,1320 1198.7,1320 1392,1126.7 1392,1014 1449.53,956.47 U5.5
MOSI: J1.3 U2.8 U5.43 | length 2637.7
  Top w8: U5.43 1590.16,804.84 1655,740 1830,740 1933.39,636.61 J1.3 2019.75,636.61 2025,631.36 2025,575 2030,570 2130,570 2135,575 2135,585 2130,590 2065.5,590 2060.5,595 2060.5,605 2065.5,610 2130,610 2135,615 2135,625 2130,630 2064.5,630 2059.5,635 2059.5,645 2064.5,650 2130,650 2135,655 2135,665 2130,670 2079.5,670 2074.5,675 2074.5,685 2079.5,690 2130,690 2135,695 2135,705 2130,710 2079.5,710 2074.5,715 2074.5,725 2079.5,730 2130,730 2135,735 2135,745 2130,750 2079.5,750 2074.5,755 2074.5,765 2079.5,770 2130,770 2135,775 2135,785 2130,790 2079.5,790 2074.5,795 2074.5,805 2079.5,810 2130,810 2135,815 2135,825 2130,830 2079.5,830 2074.5,835 2074.5,845 2079.5,850 2130,850 2135,855 2135,865 2130,870 2079.5,870 2074.5,875 2074.5,885 2079.5,890 2130,890 2135,895 2135,905 2130,910 2079.5,910 2074.5,915 2074.5,925 2079.5,930 2130,930 2135,935 2135,945 2130,950 2079.5,950 2074.5,955 2074.5,965 2079.5,970 2130,970 2135,975 2135,985 2130,990 2080,990 2075,995 2075,1190 2036.26,1228.74 U2.8
N$1: C2.2 R1.1 U5.1 X1.1 | length 307.2
  Top w8: U5.1 1528.27,952.27 1544,968 1544,1014 C2.2 R1.1
  Top w10: R1.1 1565,1145 X1.1
N$2: C3.2 R1.2 U5.2 X1.2 | length 309.5
  Top w8: R1.2 C3.2 1528,1012 1528,976 1508.58,956.58 U5.2
  Top w10: X1.2 1505,1145 R1.2
N$3: R4.2 R5.1 U5.29 | length 148.1
  Top w8: U5.29 1390.47,589.53 R5.1 R4.2
N$4: R6.2 R7.1 U5.30 | length 224.8
  Top w8: U5.30 1410.16,629.84 1428,612 1493,612 R7.1 R6.2
N$5: R8.2 R9.1 U5.31 | length 322
  Top w8: U5.31 1429.84,635.16 1435,630 1595,630 R8.2 R9.1
N$6: D2.+ R10.1 | length 65
  Top w24: R10.1 D2.+
N$7: R12.2 U2.5 | length 90.4
  Top w8: U2.5 2269.41,1175.59 R12.2
N$8: R11.2 U2.9 | length 512.7
  Top w12: U2.9 1939.31,1201.18 1929.22,1211.27 1929.22,1249.65 1954.57,1275 2275,1275 2295,1255 R11.2
N$9: R13.2 U2.12 | length 85.4
  Top w8: R13.2 1935.59,1124.41 U2.12
N$10: R15.2 U6.12 | length 101.7
  Top w12: R15.2 1165.59,1524.41 U6.12
N$11: R26.2 U4.7 | length 83.3
  Top w24: R26.2 675,1610 U4.7
N$12: R19.2 U4.2 | length 117.5
  Top w16: R19.2 910,1615 925,1600 925,1575 U4.2
N$13: C4.2 R19.1 R26.1 | length 198.3
  Top w16: C4.2 710,1691 730,1671 R26.1 R19.1
N$14: R18.2 U2.3 | length 100.3
  Top w8: U2.3 2245.59,1124.41 R18.2
N$15: C15.1 R22.1 R23.2 | length 173.5
  Top w16: R23.2 C15.1 675,1088.5 681.5,1088.5 R22.1
N$16: C17.1 R20.1 R21.2 | length 209.7
  Top w8: R21.2 894.86,1064.86 955.14,1064.86 R20.1
  Top w12: C17.1 R21.2
N$17: R24.2 U6.8 | length 498.1
  Top w10: U6.8 1296.26,1628.74 1325,1600 1325,1455 1365,1415 1485,1415 R24.2
N$18: J8.12 R17.1 | length 770.6
  Top w12: R17.1 505,1140 v1(515,1150)
  Bottom w12: J8.12 560,1594.53 560,1315 515,1270 v1(515,1150)
N$19: J8.10 R16.1 | length 252.5
  Top w12: v1(430,1150) 440,1140 R16.1
  Bottom w12: J8.10 384.92,1320.08 435,1270 435,1155 v1(430,1150)
N$20: R25.1 U6.6 | length 80.3
  Top w12: U6.6 1518.82,1601.18 R25.1
N$21: R25.2 W!INT.P$1 | length 848.4
  Top w10: R25.2 1650,1670 1835,1855 2245,1855 W!INT.P$1
N$22: C5.2 C6.2 U5.16 | length 229.6
  Top w10: C5.2 1189.21,844.21 U5.16
  Top w12: C5.2 1150,795 C6.2
N$23: R14.2 U5.12 | length 239.9
  Top w10: R14.2 1155,995 1195,995 1259.17,930.83 U5.12
N$24: R27.2 U6.2 | length 90.7
  Top w12: U6.2 1493.82,1498.82 R27.2
N$25: PWDN.P$1 R27.1 | length 733.9
  Top w10: R27.1 1855,1800 PWDN.P$1
N$26: PWR.+ R28.2 | length 65
  Top w16: PWR.+ R28.2
PB3/MOSI: R11.1 U1.32 | length 374.4
  Top w12: R11.1 2385,1255 2535,1255 2550,1240 2550,1165 2600,1115 U1.32
PB4/MISO: R18.1 R24.1 U1.36 | length 1452.3
  Top w12: R24.1 1635,1450 1785,1300 v1(2500,1300) ; R18.1 2380,1050 2540,1050 2550,1060 2550,1125 2500,1175 U1.36
  Bottom w12: U1.36 v1(2500,1300)
PB5/SCK: R12.1 U1.35 | length 165.7
  Top w12: R12.1 2405,1100 U1.35
PC4/SDA: I2C.2
PC5/SCL: I2C.1
PD0/RX: UART.1
PD1/TX: UART.2
PWDN: R3.1 U5.45 U6.3 | length 1183.9
  Top w8: U5.45 1615.79,844.21 v1(1635,825) 1655,825 R3.1
  Top w10: v1(1375,1500) 1400,1525 1439.57,1525 U6.3
  Bottom w10: v1(1375,1500) 1400,1525 1540,1525 1705,1360 1705,895 v1(1635,825)
PWR_IN: D1.- U1.23 | length 210
  Top w32: U1.23 D1.-
RESET: D3.- SW1.2 U1.28 | length 440.7
  Top w12: D3.- 955,225 985,195 985,134.41 SW1.2
  Top w16: SW1.2 1265.94,134.06 U1.28
RX+: J8.3 U4.6 | length 328.1
  Top w10: J8.3 689.76,1439.76 690.24,1440.24 725,1475 U4.6
RX-: J8.6 U4.8 | length 328
  Top w10: J8.6 532.15,1560.24 550,1542.39 550,1484.84 569.84,1465 604.53,1465 625,1485.47 U4.8
RXIN: R23.1 U4.9 U5.21 | length 1183.4
  Top w8: R23.1 584,1064 584,963 640.5,906.5 640.5,886.41 693.91,833 832,833 1033,632 1199,632 1236.5,669.5 1236.5,732.59 1249.7,745.79 U5.21
  Top w16: R23.1 625,1105 U4.9
RXIP: R22.2 U4.11 U5.20 | length 1182.6
  Top w8: R22.2 768,1062 768,1016 657.4,905.4 657.4,892.6 700,850 838,850 1040,648 1191,648 1220.5,677.5 1220.5,743.39 1242.58,765.47 U5.20
  Top w16: U4.11 725,1105 R22.2
SCK: J1.5 U2.6 U5.42 | length 2845.1
  Top w8: U5.42 1584.84,785.16 1650,720 1771.97,720 1790,701.97 1790,575 1815,550 J1.5 2217,550 2222,555 2222,565 2217,570 2170,570 2165,575 2165,585 2170,590 2217,590 2222,595 2222,605 2217,610 2170,610 2165,615 2165,625 2170,630 2217,630 2222,635 2222,645 2217,650 2170,650 2165,655 2165,665 2170,670 2217,670 2222,675 2222,685 2217,690 2170,690 2165,695 2165,705 2170,710 2217,710 2222,715 2222,725 2217,730 2170,730 2165,735 2165,745 2170,750 2217,750 2222,755 2222,765 2217,770 2170,770 2165,775 2165,785 2170,790 2217,790 2222,795 2222,805 2217,810 2170,810 2165,815 2165,825 2170,830 2217,830 2222,835 2222,845 2217,850 2170,850 2165,855 2165,865 2170,870 2217,870 2222,875 2222,885 2217,890 2170,890 2165,895 2165,905 2170,910 2217,910 2222,915 2222,925 2217,930 2170,930 2165,935 2165,945 2170,950 2219,950 2224,955 2224,965 2219,970 2167.5,970 2162.5,975 2162.5,985 2167.5,990 2217,990 2222,995 2222,1005 2217,1010 2105,1010 2100,1015 2100,1190 2111.18,1201.18 U2.6
SPDLED: J8.11 U5.4 | length 1733.7
  Top w8: J8.11 496.53,1792 904,1792 1056,1640 1056,1364 1080,1340 1203.66,1340 1408,1135.66 1408,1022 1469.21,960.79 U5.4
TCS: J1.2 U2.1 U2.11 | length 838.7
  Top w8: J1.2 2029.92,679.92 2050,700 2050,1135 v1(2035,1150) U2.11 ; v1(2165,1070) 2166.26,1071.26 U2.1
  Bottom w8: v1(2035,1150) 2035,1090 2055,1070 v1(2165,1070)
TFSS: R13.1 U1.5 | length 953.6
  Top w10: R13.1 v1(1850,1220)
  Bottom w10: v1(1850,1220) 1902.5,1272.5 1905,1275 2100,1470 U1.5
TMISO: J1.7 U2.2 | length 1563.6
  Top w8: J1.7@1978.39,460 J1.7 2016.61,463.39 2039.75,463.39 2045,468.64 2045,525 2050,530 2060,530 2065,525 2065,480 2070,475 2080,475 2085,480 2085,522 2090,527 2100,527 2105,522 2105,480 2110,475 2120,475 2125,480 2125,520 2130,525 2140,525 2145,520 2145,480 2150,475 2160,475 2165,480 2165,520 2170,525 2180,525 2185,520 2185,480 2190,475 2200,475 2205,480 2205,520 2210,525 2220,525 2225,520 2225,478 2230,473 2244.41,473 2250,478.59 2250,1005 2225,1030 2130,1030 2125,1035 2125,1090 2133.82,1098.82 U2.2
TX+: J8.1 U4.1 | length 611.3
  Top w10: J8.1 859.45,1359.45 860.55,1360.55 975,1475 U4.1
TX-: J8.2 U4.3 | length 611.6
  Top w10: J8.2 744.61,1399.61 745.39,1400.39 750,1405 750,1435 755,1440 770,1440 775,1435 775,1405 780,1400 809.03,1400 875,1465.97 U4.3
TXON: R21.1 U4.14 U5.18 | length 994.4
  Top w8: R21.1 832,1062 832,908.5 889,851.5 889,823.9 1048.9,664 1183,664 1204.5,685.5 1204.5,789.5 1219.84,804.84 U5.18
  Top w16: R21.1 875,1105 U4.14
TXOP: R20.2 U4.16 U5.17 | length 993.4
  Top w8: R20.2 1021.4,1058.6 1021.4,965.4 992,936 906.56,850.56 906.56,830.34 1056.89,680 1175,680 1188.5,693.5 1188.5,797.5 1215.53,824.53 U5.17
  Top w16: U4.16 975,1105 R20.2
W!INT: U5.40 U6.5 | length 1476.9
  Top w8: U5.40 1574.21,745.79 1660,660 1720,660 v1(1750,690)
  Top w10: v1(1375,1600) 1400,1575 1439.57,1575 U6.5
  Bottom w10: v1(1375,1600) 1400,1575 1560,1575 1745,1390 1745,695 v1(1750,690)
WCS: U5.41 U6.10 U6.11 | length 1545.9
  Top w8: U5.41 1579.53,765.47 1655,690 v1(1700,690)
  Top w10: U6.11 v1(1275,1550) 1275,1570 1269.41,1575.59 U6.10
  Bottom w10: v1(1275,1550) 1550,1550 1725,1375 1725,715 v1(1700,690)
WMISO: U5.44 U6.9 | length 1593.4
  Top w8: U6.9 1288.82,1601.18 1305,1585 1305,1445 1360,1390 1660,1390 1800,1250 1800,1050 1825,1025 1825,800 1781.5,756.5 1663.5,756.5 1595.47,824.53 U5.44
WRST: D3.+ R2.1 U5.46 | length 1482.6
  Top w8: U5.46 1597.9,863.9 v1(1605,871) 1629,871 1655,845 1700,845 R2.1
  Top w12: D3.+ 855,225 1025,395 1565,395 v1(1605,435)
  Bottom w12: v1(1605,435) v1(1605,871)
WSS: R15.1 U1.11 | length 505.5
  Top w10: R15.1 1170,1670 1440,1940 U1.11
pads on no net: J1.1 J1.8 J1.9 J8.13 J8.14 P2.P$1 P3.P$1 U1.1 U1.2 U1.3 U1.4 U1.6 U1.7 U1.8 U1.9 U1.10 U1.12 U1.13 U1.14 U1.15 U1.16 U1.17 U1.18 U1.19 U1.20 U1.21 U1.22 U1.27 U1.31 U1.33 U1.34 U4.4 U4.5 U4.12 U4.13

## Polygon pours and split planes (outlines as drawn)
3V3 on Bottom "Polygon_3_Net_3V3" (solid, remove dead copper, pour order 3): 558,683 192,683 192,167 558,167
GND on Bottom "Polygon_3_Net_GND" (solid, remove dead copper, pour order 5): -5,2105 2542.07,2105 2605,2042.07 2605,1592.07 2705,1492.07 2705,197.93 2605,97.93 2605,-5 -5,-5
GND on Bottom "Polygon_1_Net_GND" (solid, remove dead copper, pour order 0): -133,2108 -67,2108 -67,2042 -133,2042
3V3 on Top "Polygon_2_Net_3V3" (solid, remove dead copper, pour order 1): 558,683 192,683 192,167 558,167
3V3 on Top "Polygon_1_Net_3V3" (solid, remove dead copper, pour order 2): 558,683 192,683 192,167 558,167
GND on Top "Polygon_2_Net_GND" (solid, remove dead copper, pour order 4): -5,2105 2542.07,2105 2605,2042.07 2605,1592.07 2705,1492.07 2705,197.93 2605,97.93 2605,-5 -5,-5

## Keep-outs
Top:
  region: 1280,655 1280,935 1560,935 1560,655
  region: -434,-1076 -584,-1076 -584,-1068 -434,-1068
Keep-Out Layer:
  lines w0: 2700,200 2600,100 2600,50 cw(c2550,50) 2550,0 50,0 cw(c50,50) 0,50 0,1172.05 260.24,1172.05 260.24,1171.65 ccw(c299.61,1171.65) 299.61,1132.28 301.57,1132.28 ccw(c301.57,1171.65) 340.94,1171.65 340.94,1828.35 ccw(c301.57,1828.35) 301.57,1867.72 300.4,1867.72 ccw(c300.4,1828.35) 261.03,1828.74 261.02,1827.95 0,1827.95 0,2050 cw(c50,2050) 50,2100 2500,2100 cw(c2500,2000) 2600,2000 2600,1590 2700,1490 2700,975 2600,875 2600,450 2700,350

## Silkscreen, mask and mechanical layers (free items; w line width, h text height)
Dimension:
  lines w0: 2700,200 2600,100 2600,50 cw(c2550,50) 2550,0 50,0 cw(c50,50) 0,50 0,1172.05 260.24,1172.05 260.24,1171.65 ccw(c299.61,1171.65) 299.61,1132.28 301.57,1132.28 ccw(c301.57,1171.65) 340.94,1171.65 340.94,1828.35 ccw(c301.57,1828.35) 301.57,1867.72 300.4,1867.72 ccw(c300.4,1828.35) 261.03,1828.74 261.02,1827.95 0,1827.95 0,2050 cw(c50,2050) 50,2100 2500,2100 cw(c2500,2000) 2600,2000 2600,1590 2700,1490 2700,975 2600,875 2600,450 2700,350
tPlace:
  text "AJ2" at 880,1955 h29.75 r90
  text "AJ1" at 1740,1955 h29.75 r90
  text "SCL" at 1657.5,1625 h27.2
  text "RX" at 2032.5,1625 h27.2
  text "SDA" at 1657.5,1562.5 h27.2
  text "TX" at 2032.5,1562.5 h27.2
  text "5V" at 1690,1500 h27.2
  text "5V" at 2035,1500 h27.2
  text "GND" at 1657.5,1442.5 h27.2
  text "GND" at 2002.5,1442.5 h27.2
  text "AJ3" at 2550,1260 h29.75
  text "AJ5" at 1240,55 h29.75 r90
  text "AJ4" at 1940,55 h29.75 r90
bPlace:
  text "W5200 Ethernet Shield" at 1775,1375 h59.5
  text "v2.0 08/22/2012" at 1775,1275 h42.5
  text "by Seeed Studio" at 1775,1175 h42.5
  text "www.seeedstudio.com" at 1775,1075 h42.5

## Text inside footprints (layer, text, board x,y; h text height)
J8: tPlace "11" at 425,1725 h27.2 r270; tPlace "12" at 425,1800 h27.2 r270; tPlace "9" at 425,1225 h27.2 r270; tPlace "10" at 425,1325 h27.2 r270; tPlace "6" at 350,1575 h27.2 r270; tPlace "2" at 350,1400 h27.2 r270; Route Tool Path "Slot Hole for convex part" at -200,1825 h27.2 r270; Route Tool Path "Slot Drills" at 50,1025 h27.2; Route Tool Path "Slot Drills" at 50,1950 h27.2
U1: tPlace "3" at 2280,175 h42.5; tPlace "Vin" at 1740,175 h42.5; tPlace "GND" at 1580,175 h42.5; tPlace "5V" at 1465,175 h42.5; tPlace "3V3" at 1425,175 h42.5 r90; tPlace "RST" at 1320,175 h42.5 r90; tPlace "ANALOG" at 2125,250 h42.5; tPlace "5" at 2480,175 h42.5; tPlace "4" at 2380,175 h42.5; tPlace "2" at 2185,175 h42.5; tPlace "0" at 1980,175 h42.5; tPlace "0" at 1420,1810 h42.5; tPlace "1" at 1320,1810 h42.5; tPlace "2" at 1220,1810 h42.5; tPlace "3" at 1120,1810 h42.5; tPlace "AREF" at 965,1755 h42.5 r90; tPlace "GND" at 1060,1795 h42.5 r90; tPlace "1" at 1120,1870 h42.5; tPlace "1" at 1220,1870 h42.5; tPlace "1" at 1320,1875 h42.5; tPlace "1" at 1420,1875 h42.5; tPlace "9" at 1520,1875 h42.5; tPlace "8" at 1620,1875 h42.5; tPlace "7" at 1785,1875 h42.5; tPlace "6" at 1885,1875 h42.5; tPlace "5" at 1985,1875 h42.5; tPlace "4" at 2085,1875 h42.5; tPlace "3" at 2185,1875 h42.5; tPlace "2" at 2285,1875 h42.5; tPlace "1" at 2085,175 h42.5; tPlace "1" at 2385,1875 h42.5; tPlace "0" at 2485,1875 h42.5